# EAGLE board gps module (EAGLE 7.5.0)
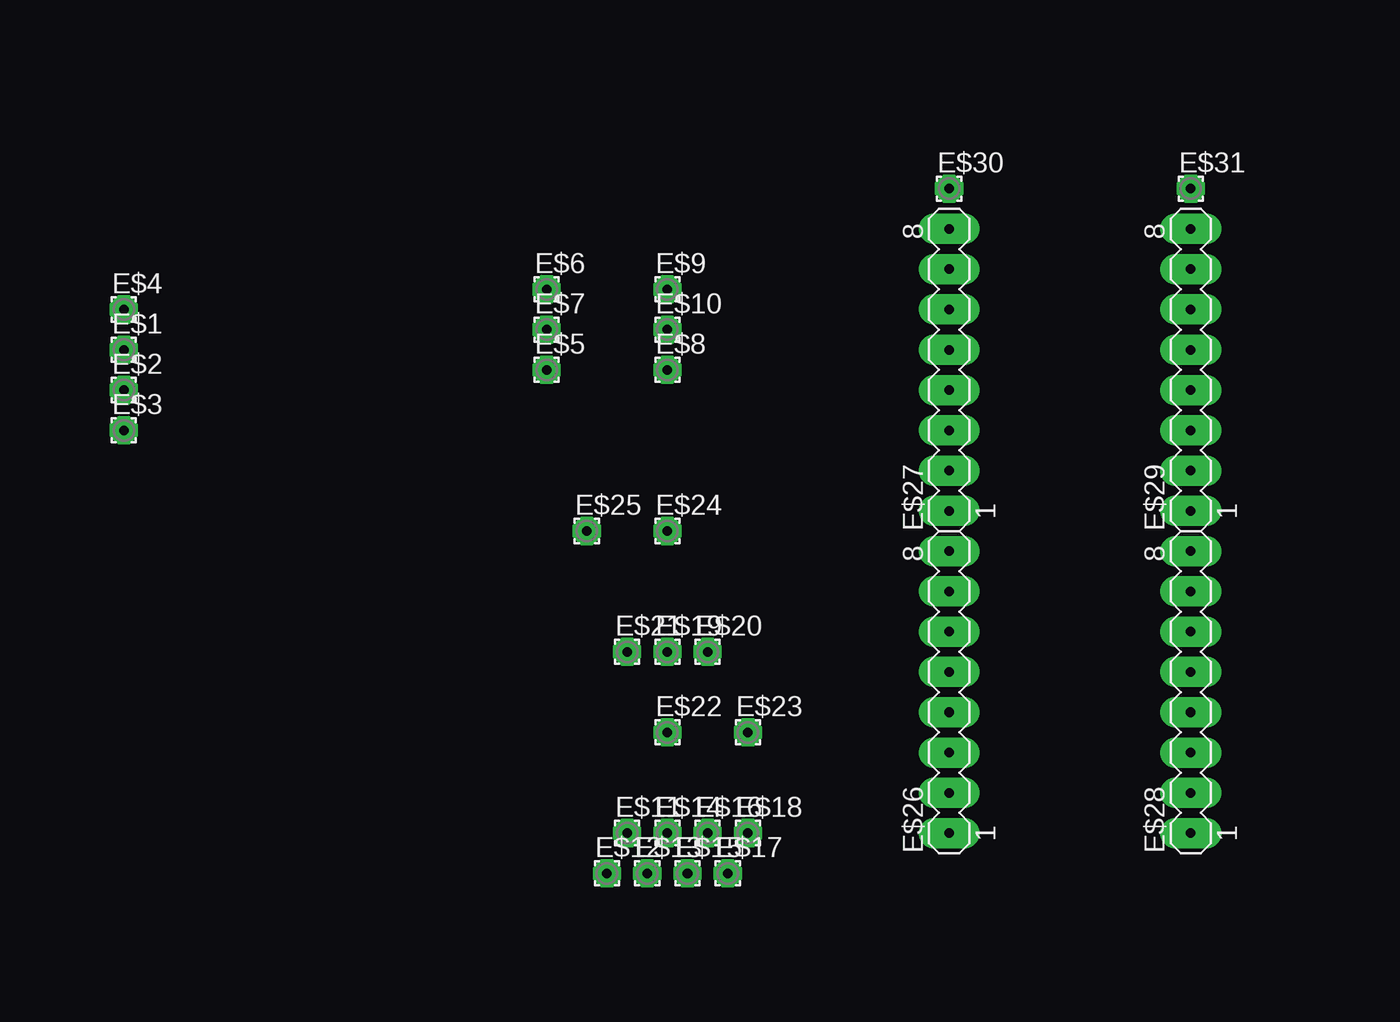
[diagram p0: board, top side]
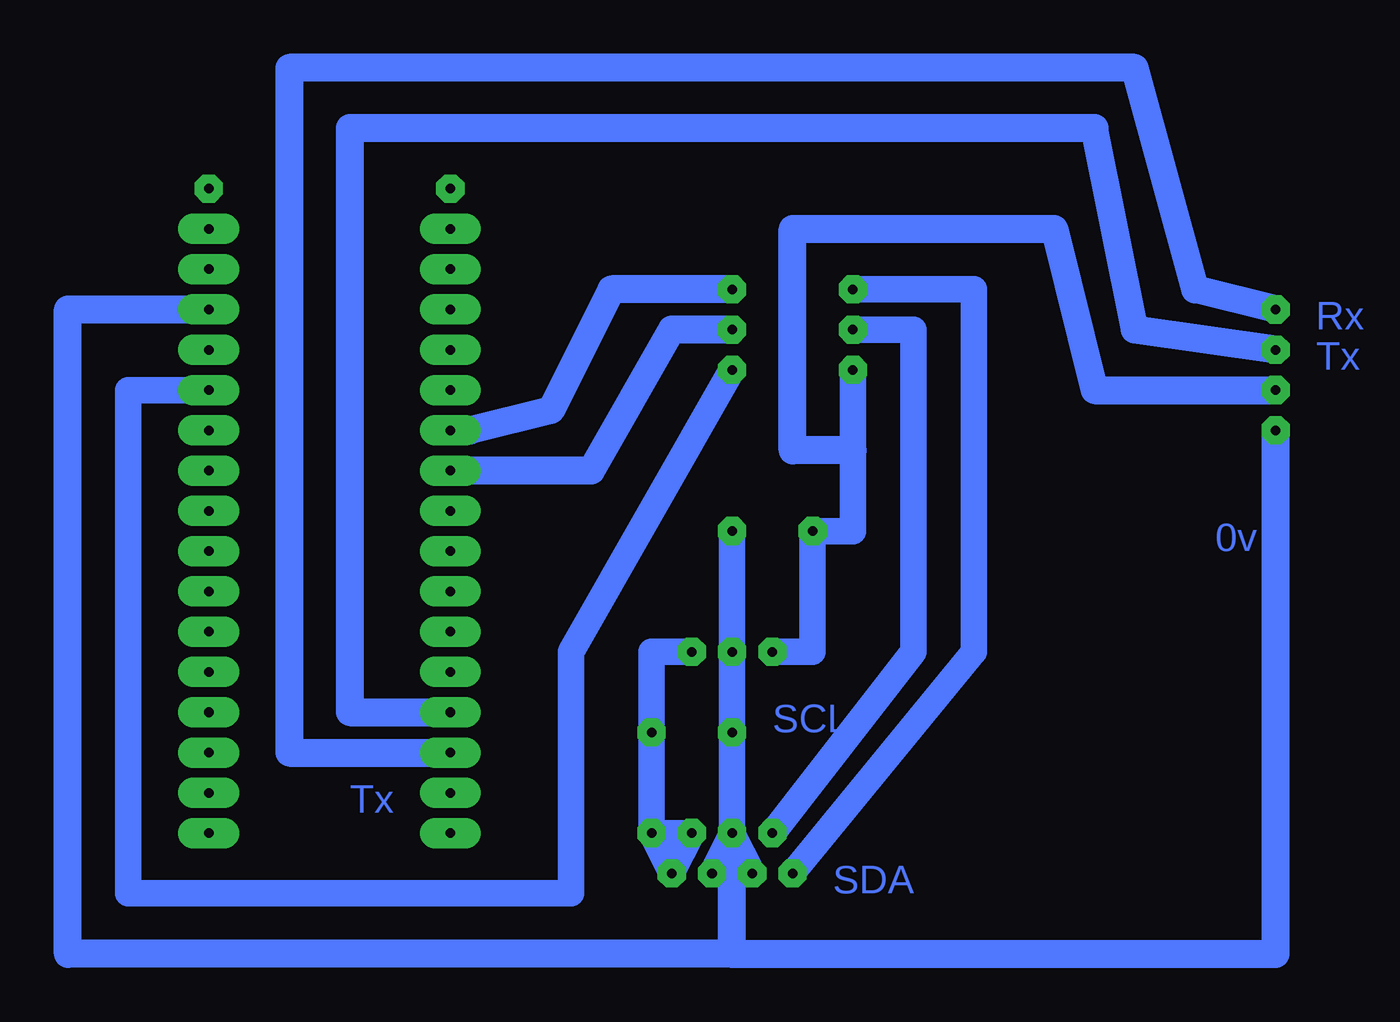
[diagram p1: board, bottom side, seen from below]

No outline drawn. Coordinates in mm, seen from the top.
Copper layers (1*16): Top 0.035mm / dielectric 1.5mm / Bottom 0.035mm
Design rules "default": minimum track width 10mil, minimum drill 24mil, track to track 8mil, track to pad 8mil, pad to pad 8mil, via to via 8mil, smd to smd 8mil, copper to edge 40mil, drill to drill 8mil, minimum pad ring 10mil, minimum via ring 8mil, stop-mask expansion 4mil, vias tented up to drill 0mil, thermal gap 10mil

## Footprints (pad centres in the part's own frame; a part is rotated, then mirrored left to right if it is on the bottom)
1,6/0,8 = drill 0.6 pad 1.778 octagon: 1 0,0
MA08-1 = drill 0.6 pad 1.93 long: 1 -8.89,0; 2 -6.35,0; 3 -3.81,0; 4 -1.27,0; 5 1.27,0; 6 3.81,0; 7 6.35,0; 8 8.89,0

## Placement (x,y rotation side)
E$1  [1,6/0,8]  7.62,39.37 0 top
E$2  [1,6/0,8]  7.62,36.83 0 top
E$3  [1,6/0,8]  7.62,34.29 0 top
E$4  [1,6/0,8]  7.62,41.91 0 top
E$5  [1,6/0,8]  34.29,38.1 0 top
E$6  [1,6/0,8]  34.29,43.18 0 top
E$7  [1,6/0,8]  34.29,40.64 0 top
E$8  [1,6/0,8]  41.91,38.1 0 top
E$9  [1,6/0,8]  41.91,43.18 0 top
E$10  [1,6/0,8]  41.91,40.64 0 top
E$11  [1,6/0,8]  39.37,8.89 0 top
E$12  [1,6/0,8]  38.1,6.35 0 top
E$13  [1,6/0,8]  40.64,6.35 0 top
E$14  [1,6/0,8]  41.91,8.89 0 top
E$15  [1,6/0,8]  43.18,6.35 0 top
E$16  [1,6/0,8]  44.45,8.89 0 top
E$17  [1,6/0,8]  45.72,6.35 0 top
E$18  [1,6/0,8]  46.99,8.89 0 top
E$19  [1,6/0,8]  41.91,20.32 0 top
E$20  [1,6/0,8]  44.45,20.32 0 top
E$21  [1,6/0,8]  39.37,20.32 0 top
E$22  [1,6/0,8]  41.91,15.24 0 top
E$23  [1,6/0,8]  46.99,15.24 0 top
E$24  [1,6/0,8]  41.91,27.94 0 top
E$25  [1,6/0,8]  36.83,27.94 0 top
E$26  [MA08-1]  59.69,17.78 90 top
E$27  [MA08-1]  59.69,38.1 90 top
E$28  [MA08-1]  74.93,17.78 90 top
E$29  [MA08-1]  74.93,38.1 90 top
E$30  [1,6/0,8]  59.69,49.53 0 top
E$31  [1,6/0,8]  74.93,49.53 0 top

## Library data of the parts
E$1-E$31 = cls

## Nets
S$1: E$7.1 E$11.1
S$2: E$6.1 E$12.1
S$3: E$2.1 E$5.1 E$21.1 E$25.1
S$4: E$13.1 E$14.1 E$15.1 E$19.1 E$22.1 E$24.1
S$5: E$3.1 E$29.6
S$6: E$8.1 E$29.4
S$7: E$10.1 E$27.2
S$8: E$9.1
S$9: E$16.1 E$17.1 E$18.1 E$20.1
S$10: E$1.1 E$26.4
S$11: E$4.1 E$26.3

## Tracks (layer width: path | path; a pad name or v marks a point on that pad's centre or on a via)
S$1
  Bottom 1.676: E$11.1 30.48,20.32 30.48,40.64 E$7.1
S$2
  Bottom 1.676: E$12.1 26.67,20.32 26.67,43.18 E$6.1
S$3
  Bottom 1.676: E$5.1 34.29,33.02 34.29,27.94 E$25.1 36.83,20.32 E$21.1
  Bottom 1.778: 34.29,33.02 38.1,33.02 38.1,46.99 21.59,46.99 19.05,36.83 E$2.1
S$4
  Bottom 1.676: E$14.1 E$15.1 E$13.1 E$14.1 | E$14.1 E$22.1 E$19.1 E$24.1
S$5
  Bottom 1.778: 41.91,1.27 83.82,1.27 83.82,41.91 E$29.6 | 41.91,1.27 41.91,7.62 | 41.91,1.27 7.62,1.27 E$3.1
S$6
  Bottom 1.676: E$8.1 52.07,20.32 52.07,5.08 80.01,5.08 80.01,36.83 E$29.4
S$7
  Bottom 1.778: E$10.1 45.72,40.64 50.8,31.75 E$27.2
S$8
  Bottom 1.778: E$9.1 49.53,43.18 53.34,35.56 58.42,34.29
S$9
  Bottom 1.676: E$20.1 46.99,20.32 E$18.1 | E$18.1 E$17.1 E$16.1 E$18.1
S$10
  Bottom 1.778: E$1.1 16.51,40.64 19.05,53.34 66.04,53.34 66.04,16.51 E$26.4
S$11
  Bottom 1.778: E$4.1 12.7,43.18 16.51,57.15 69.85,57.15 69.85,13.97 E$26.3

## Text on the board
Bottom: Rx | Tx | 0v | SCL | Tx | SDA